# Altium PCB amplifier.PcbDoc
Units mil, origin at the board's own origin, x right, y up, seen from the top; angles counter-clockwise.
Board outline 473.22 x 1259.84 mil, 2 copper layers (Top Layer, Bottom Layer); 25 components, 19 nets, 69 pads, 12 vias.
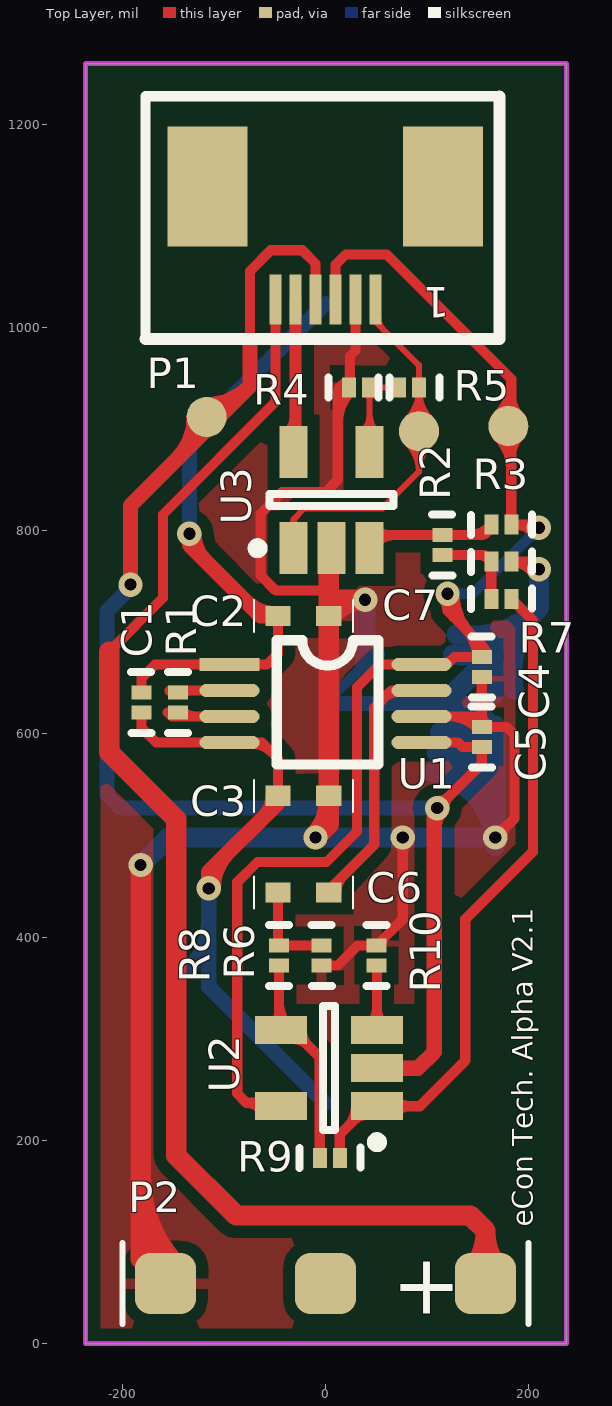
[diagram p0: Top Layer view]
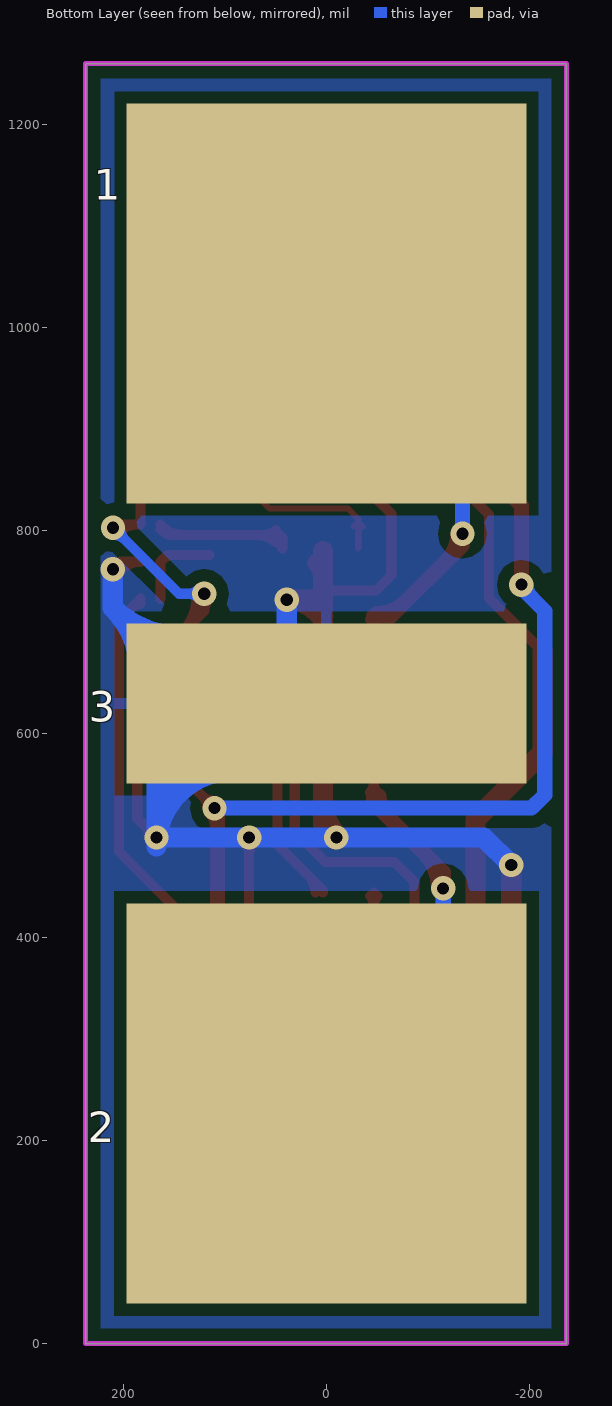
[diagram p1: Bottom Layer view, seen from below]

## Layer stack, top to bottom
Top Layer: signal copper 1.4
Dielectric: dielectric 12.6, FR-4, Dk 4.8
Bottom Layer: signal copper 1.4

## Board outline
-236.22,0 237,0 237,1259.84 -236.22,1259.84

## Design rules (kind name [scope] priority, off if disabled: settings)
AssemblyTestPointUsage [All] p1 off:
AssemblyTestpoint [All] p1 off: testpointundercomponent=TRUE minsize=40 maxsize=100 preferedsize=60 minholesize=0 maxholesize=40 preferedholesize=32 testpointgrid=1 usegrid=TRUE gridtolerance=0.01 allowsidetop=TRUE allowsidebottom=TRUE
Clearance Clearance_1 [InPolygon] p1: gap=12
Clearance [All] p2: gap=5
ComponentClearance [All] p1 off: gap=10 collisioncheckmode=3 verticalgap=10 showdistances=FALSE
DiffPairsRouting [All] p1 off: maxlimit=10 minlimit=10 mostfreqgap=10 maxuncoupledlength=500
FabricationTestPointUsage [All] p1 off: valid=0 allowmultiple=FALSE
FabricationTestpoint [All] p1 off: side=3 testpointundercomponent=TRUE minsize=40 maxsize=100 preferedsize=60 minholesize=0 maxholesize=40 preferedholesize=32 testpointgrid=1 allowsidetop=TRUE allowsidebottom=TRUE usegrid=TRUE gridtolerance=0.01
FanoutControl Fanout_BGA [IsBGA] p1 off: bgadir=Out bgaviamode=Centered fanoutstyle=Auto fanoutdirection=Alternating viagrid=1 // Fanout_BGA (Default Rule)
FanoutControl Fanout_LCC [IsLCC] p2 off: bgadir=Out bgaviamode=Centered fanoutstyle=Auto fanoutdirection=Alternating viagrid=1 // Fanout_LCC (Default Rule)
FanoutControl Fanout_SOIC [IsSOIC] p3 off: bgadir=Out bgaviamode=Centered fanoutstyle=Auto fanoutdirection=Alternating viagrid=1 // Fanout_SOIC (Default Rule)
FanoutControl Fanout_Small [(CompPinCount < 5)] p4 off: bgadir=Out bgaviamode=Centered fanoutstyle=Auto fanoutdirection=OutThenIn viagrid=1 // Fanout_Small (Default Rule)
FanoutControl Fanout_Default [All] p5 off: bgadir=Out bgaviamode=Centered fanoutstyle=Auto fanoutdirection=Alternating viagrid=1 // Fanout_Default (Default Rule)
Height [All] p1 off: minheight=0 maxheight=1000 prefheight=500
HoleSize [All] p1 off: absolutevalues=TRUE maxlimit=100 minlimit=1 maxpercent=80.000 minpercent=20.000
HoleToHoleClearance [All] p1 off: gap=10 allowstackedmicrovias=TRUE
LayerPairs [All] p1 off: enforce=TRUE
MinimumSolderMaskSliver [All] p1 off: minsoldermaskwidth=10
NetAntennae [All] p1 off: netantennaetolerance=0
PasteMaskExpansion [All] p1 off: expansion=0
PlaneClearance [All] p1 off: clearance=20
PlaneConnect [All] p1 off: planeconnectstyle=Relief reliefexpansion=20 reliefentries=4 reliefconductorwidth=10 reliefairgap=10
PolygonConnect PolygonConnect_1 [(InPadClass('All Pads'))] p1: connectstyle=Relief reliefconductorwidth=10 reliefentries=4 polygonreliefangle="90 Angle" airgapwidth=10
PolygonConnect [All] p2: connectstyle=Direct reliefconductorwidth=10 reliefentries=4 polygonreliefangle="90 Angle" airgapwidth=10
RoutingCorners [All] p1 off: cornerstyle=45-Degree minsetback=100 maxsetback=100
RoutingLayers [All] p1 off: top layer_v5=TRUE bottom layer_v5=TRUE
RoutingPriority [All] p1 off: routingpriority=0
RoutingTopology [All] p1 off: topology=Shortest
RoutingVias [All] p1: holewidth=12 width=24 viastyle="Through Hole" minholewidth=12 minwidth=24 maxholewidth=12 maxwidth=24
SilkToSilkClearance [All] p1 off: silktosilkclearance=10
SilkToSolderMaskClearance SilkscreenOverComponentPads [IsPad] p1 off: minsilkscreentomaskgap=10 clearancetoexposedcopper=TRUE
SolderMaskExpansion [All] p1 off: expansion=4
Width [All] p1: maxlimit=20 minlimit=6 preferedwidth=6
2 further rules are at their usual default settings.

## Components (designator, comment, footprint, x,y, rotation, side; value= is the part's Value field where it differs from the comment)
1 "Electrode" elec-diff 0,1023.62 r270 bottom locked
2 "Electrode" elec-diff 0,236.22 r270 bottom locked
3 "Electrode" elec-ref 0,629.92 r270 bottom locked
C1 "" 0201 -181.22,631 r90 top
C2 "" "0402 - MI" -46.78,716 r0 top
C3 "" "0402 - MI" 3.22,539 r180 top
C4 "Cap" 0201 153.78,666 r270 top
C5 "Cap" 0201 153.78,597 r270 top
C6 "" "0402 - MI" -46.78,443.84 r0 top
C7 "" 0201 173,769.5 r180 top
P1 "Header 6" "6P_0.5mm(FPC) - duplicate" 49.21,1027.56 r180 top locked
P2 "Header 3" BAT3 0,59.06 r0 top locked (schematic designator P3)
R1 "4.42k" 0201 -145.22,631 r270 top
R2 "10K" 0201 115,786 r90 top
R3 "10K" 0201 173,806 r180 top
R4 "10K" 0201 33.16,941 r180 top
R5 "10K" 0201 82.09,941 r180 top
R6 "2.7K" 0201 -3.78,381.84 r90 top
R7 "1K" 0201 173,733 r180 top
R8 "1K" 0201 -45.78,381.84 r270 top
R9 "10K" 0201 4.22,182.84 r0 top
R10 "2.7K" 0201 50.22,381.84 r270 top
U1 "AD8236" MSOP-8 0,629.92 r0 top locked
U2 "AD8603" SOT23-5AM 3.32,271 r180 top
U3 "AD8603" SOT23-5AM 6,830 r90 top locked

## Footprints (in the part's own frame and the unit in brackets; to place one, negate y for a bottom-side part, rotate by r counter-clockwise, add the part's x,y. Pads: shape width x height; smd on the part's side, far side on the other; paste and mask are expansions set on the pad)
"6P_0.5mm(FPC) - duplicate" [mm]
  rect 2x3 smd: 0(-1.69,-2.825) 7(4.2,-2.825)
  rect 0.3x1.25 smd mask+0.051: 1(0,0) 2(0.5,0) 3(1,0) 4(1.5,0) 5(2,0) 6(2.5,0)
  silkscreen extent -3.1,-5.08 5.75,0.99
0201 [mm]
  rect 0.35x0.5 smd: 1(-0.25,0) 2(0.25,0)
  silkscreen extent -0.76,-0.25 0.76,0.25
"0402 - MI" [mil]
  rect 25x20 smd: 1(0,0) 2(50,0)
  silkscreen extent -24,-16 74,16
BAT3 [mil]
  rrect50% 60x60 smd: 1(-157.48,0) 2(0,0) 3(157.48,0)
  silkscreen extent -200,-40 200,40
elec-diff [mm] "12*5mm"
  rect 10x10 smd: 1(0,0)
elec-ref [mm] "12*5mm"
  rect 4x10 smd: 1(0,0)
MSOP-8 [mm]
  rect 1.5x0.325 smd: 1(-2.4,0.975)
  oval 1.5x0.325 smd: 2(-2.4,0.325) 3(-2.4,-0.325) 4(-2.4,-0.975) 5(2.4,-0.975) 6(2.4,-0.325) 7(2.4,0.325) 8(2.4,0.975)
  silkscreen extent -1.22,-1.52 1.32,1.58
SOT23-5AM [mm] "SOT23, 5-Leads, Body 2.9x1.7mm, Pitch 0.95mm, Lead Span 2.8mm, IPC Low Density"
  rect 1.3x0.7 smd: 1(-1.2,0.95) 2(-1.2,0) 3(-1.2,-0.95) 4(1.2,-0.95) 5(1.2,0.95)
  silkscreen extent -1.33,-1.55 0.15,1.97, body extent -0.9,-1.55 0.9,1.55, height 1.45

## Part data
C1 C2 C3 C6 C7: library part Cap, "Capacitor"
C4 C5: "Capacitor"
P1: "Header, 6-Pin"
P2: "Header, 3-Pin"
R1 R2 R3 R4 R5 R6 R7 R8 R9 R10: library part Res2, "Resistor"
U1: library part INA128UA, "Precision, Low-Power Instrumentation Amplifiers"

## Free pads (board coordinates)
  round 39.37 smd: 0(92,898) 1(180,903) 2(-117,912)

## Via types
v1: diameter 24, hole 12, Top Layer to Bottom Layer, tented both sides, 9 vias
v2: diameter 24, hole 12, Top Layer to Bottom Layer, 3 vias

## Nets (pads, with @x,y where several pads share a name; then routed paths per layer and width w, separated by ;. In a path a pad name is that pad's centre, name@x,y a point inside that pad or via, vN(x,y) a via of type N, cw(c..) or ccw(c..) an arc to the next point about the centre after c; other vN are vias at no path point)
+3.3V: P1.5 U3.5 | length 180.6
  Top Layer w6: U3.5 U3.5@-29.53,879.12
  Top Layer w12: U3.5@-36.9,894.56 ccw(c-54.71,912.36) -29.53,912.36 ; U3.5@-29.53,879.12 P1.5 ; -29.53,903.31 ccw(c-17.14,903.31) U3.5@-25.9,894.56
+3.7V: P1.6 P2.3 | length 1400.6
  Top Layer w10: -213,681 -160,734 -160,816 -49.21,926.79 P1.6
  Top Layer w20: -213,681 -213,582.09 -146.91,516 -146.91,184.91 -88,126 142.48,126 157.48,111 P2.3 ; P2.3@143.34,73.2 ccw(c109.2,107.34) 157.48,107.34 ccw(c205.76,107.34) P2.3@171.62,73.2
+VS: C4.1 P1.3 pad.1 R3.1 U1.8 U2.5 | length 1659.7
  Top Layer w10: U2.5@-63.15,228.89 ccw(c-77.9,219.52) -77.9,237 ; U2.5 -47.33,237 -77.91,237 ; P1.3 9.84,1061.75 20.09,1072 60.09,1072 182.84,949.25 R3.1 205.09,806 210,801.09 v1(210,803) ; v1@115.14,733.05 cw(c103.19,721.1) 120.09,721.1 cw(c136.99,721.1) v1@125.04,733.05 ; v1@117.09,738 ccw(c150.89,738) 126.99,714.1 ; U1.8@117.62,669.7 ccw(c117.62,677.38) 123.05,671.95 ; v1(120.09,738) 120.09,721 153.78,687.32 C4.1 126.94,675.84 119.4,668.31 U1.8 53.31,668.31 31,646 31,504 1,474 -66.91,474 -86.91,454 -86.91,246 -77.91,237 ; v1@127.09,738 ccw(c185.04,738) 144.07,697.03 ; 137.4,703.69 cw(c109.55,675.84) C4.1@148.94,675.84 ; 154.47,686.62 cw(c143.69,675.84) C4.1@158.94,675.84 ; pad.1@169.62,892.62 cw(c137.68,860.68) 182.84,860.68 ; pad.1@169.62,913.38 ccw(c137.68,945.32) 182.84,945.32 ; 182.84,874.41 cw(c208.59,874.41) pad.1@190.38,892.62 ; 182.84,931.59 ccw(c208.59,931.59) pad.1@190.38,913.38 ; R3.1@185.86,806 cw(c185.86,778.86) v1@205.05,798.05
  Bottom Layer w10: v1(120.09,738) 145,738 205,798 213.09,798 210,801.09 v1(210,803) ; v1@125.04,733.05 cw(c136.99,721.1) 136.99,738 cw(c136.99,754.9) v1@125.04,742.95 ; v1@203,803 cw(c186.1,803) 198.05,791.05 cw(c210,779.1) v1@210,796
-VS: C5.2 P1.4 pad.2 U1.5 U2.2 | length 1634.6
  Top Layer w10: -74.41,985 -74.41,1055.5 -53.91,1076 -22.91,1076 -9.84,1062.94 P1.4 ; U1.5 130.56,591.54 135.09,587 C5.2@153.62,587 ; v1@107.09,524 153.78,570.68 C5.2 ; v1@110,534 ccw(c110,551.13) 122.11,539.02 ; v1@117,527 cw(c133.67,527) 121.88,538.79
  Top Layer w15: v2(-192,747) -192,824.91 -74.41,942.5 -74.41,985 ; -146.35,870.55 ccw(c-187.8,912) pad.2@-129.19,912 ; pad.2@-117,924.18 ccw(c-117,982.8) -75.55,941.35 ; U2.2 91.09,271 107.09,287 v1@107.09,524 ; U2.2@66.81,266.56 cw(c77.53,255.84) 77.53,271 cw(c77.53,286.16) U2.2@66.81,275.44 ; 107.09,509.12 cw(c127.88,509.12) v1@113.18,523.82
  Bottom Layer w15: -201.8,734.2 ccw(c-214.61,747) v2@-196.5,747 ; v2(-192,747) -192,744 -215,721 -215,540 -202,527 v1(110,527)
GND: 3.1 C2.2 C3.1 C4.2 C5.1 C7.1 P1.2 P2.1 R4.2 R6.1 R10.1 U1.6 U3.2 | length 4004.4
  Top Layer w10: R6.1 12.09,372 31.78,391.68 R10.1 76,417.46 v1(76,498) ; C2.2@-1.91,716 C2.2@3.22,710.87 ; 3.22,732 C2.2 3.22,741 -48.91,741 -63.91,756 -63.91,817 -42.91,838 0,838 12.09,850.09 12.09,929.78 R4.2 24.09,941.78 24.09,972 29.53,977.43 P1.2 ; U3.2@3.22,779.98 U3.2 ; 12.09,906.4 cw(c54.97,906.4) R4.2@24.65,936.71 ; 12.09,924.11 cw(c24.17,924.11) R4.2@23.43,936.16 ; 12.09,930.54 cw(c30.82,930.54) R4.2@17.58,943.78 ; 12.09,934.74 cw(c23.52,934.74) R4.2@22.82,946.14 ; 15.05,932.73 cw(c23.32,924.47) R4.2@23.32,936.16 ; R10.1@55.06,391.68 cw(c66.75,391.68) 58.49,399.95 ; v1@71.05,493.05 cw(c59.1,481.1) 76,481.1 cw(c92.9,481.1) v1@80.95,493.05 ; U1.6 143.5,617.13 C5.1 ; U1.6@121.44,617.13 cw(c121.44,577.45) C5.1@149.49,605.51 ; 145.51,615.11 cw(c137.25,606.84) C5.1@148.94,606.84 ; 145.58,617.13 cw(c145.58,601.6) C5.1@156.56,612.58 ; C4.2 C5.1 ; v1@167.09,504 173.09,504 186.09,517 186.09,599 178.25,606.84 C5.1 ; v1@167.09,505 ccw(c167.09,521.9) 179.04,509.95 ccw(c190.99,498) v1@174.09,498 ; v1@204.29,758.09 ccw(c182.84,743.64) C7.1 202.59,769.5 v1(210.09,762) ; 3.22,728.07 ccw(c15.29,728.07) 6.76,719.54 cw(c15.29,728.07) 3.22,728.07 ; 3.22,728.07 cw(c-8.85,728.07) -0.32,719.54 ccw(c-8.85,728.07) 3.22,728.07
  Top Layer w20: -182,118.25 ccw(c-98.28,118.25) P2.1 -182,83.57 v2(-182,471) ; -182,166.54 ccw(c-50,166.54) P2.1@-143.34,73.2 ; v1@-11.32,499.41 ccw(c-46.42,534.52) C3.1@3.22,534.52 ; v1(-9.91,498) 3.22,511.13 C3.1 C2.2@3.22,710.87 ; C2.2 U3.2@3.22,779.98 ; 3.22,732 v1(39,732) ccw(c39,689.39) C2.2@5.72,716 ; 3.22,755.11 cw(c21.83,755.11) U3.2@8.67,768.27
  Bottom Layer w10: 3.1@39,668.92 3.1 3.1@115.92,629.92
  Bottom Layer w15: 3.1 145.08,629.92 3.1@167.09,607.91
  Bottom Layer w20: v2(-182,471) -155,498 ; -105,498 -155,498 ; 3.1@39,668.92 v1(39,732) ; 3.1@39,701.72 ccw(c71.8,701.72) 3.1@48.61,678.53 ; 3.1@105.98,562.26 cw(c92.87,489.2) v1@167.09,489.2 ; 3.1@109.51,581.95 cw(c97.16,513.11) 167.09,513.11 ; 3.1@113.04,601.63 cw(c101.45,537.02) 167.09,537.02 ; 3.1@115.92,629.92 210.09,724.09 ; 3.1@116.57,621.32 cw(c105.74,560.92) 3.1@167.09,560.92 ; 3.1@125.81,678.05 ccw(c136.14,742.64) 3.1@182.39,696.39 ; 3.1@128.97,697.8 ccw(c143.78,790.41) 210.09,724.09 ; 3.1@165.92,639.39 cw(c229.27,651.94) 3.1@183.61,697.61 ; 3.1@167.09,607.91 v1(167.09,498) v1(76,498) v1(-9.91,498) -155,498 ; 3.1@185.54,643.28 cw(c273.48,660.7) 210.09,724.09 ; v1(210.09,762) 210.09,724.09
Net1_1: 1.1 C1.2 C2.1 U1.1 | length 685.3
  Top Layer w10: C1.2 -181.22,654.78 -167.69,668.31 U1.1 -57.6,668.31 -46.78,679.13 C2.1 ; C2.1@-50.32,712.46 cw(c-58.85,703.93) -46.78,703.93 cw(c-34.71,703.93) C2.1@-43.24,712.46
  Top Layer w15: v2(-134,797) -134,786.09 -63.91,716 C2.1 ; v2@-129.5,797 ccw(c-92.31,797) -118.61,770.7 ; -78.52,730.61 ccw(c-49.28,759.85) C2.1@-49.28,718.5
  Bottom Layer w15: v2(-134,797) -134,889.62 1.1
Net2_1: 2.1 C1.1 C3.2 U1.4 | length 727.6
  Top Layer w10: C1.1 -181.22,606.22 -166.54,591.54 U1.4 -62.54,591.54 -46.78,575.78 C3.2 ; U1.4@-71.36,590.14 cw(c-71.36,565.46) -53.91,582.91 ; C3.2@-50.32,542.54 ccw(c-58.85,551.07) -46.78,551.07 ccw(c-34.71,551.07) C3.2@-43.24,542.54
  Top Layer w15: v1(-115,448) -115,463.91 -46.78,532.13 C3.2 ; v1@-110.5,448 cw(c-61.24,448) -96.07,482.83 ; -60.18,518.73 ccw(c-80.45,539) C3.2@-51.78,539
  Bottom Layer w15: 2.1@-133.89,370.11 ccw(c-179.5,415.72) 2.1@-115,415.72 ; v1(-115,448) -115,351.22 2.1
NetC6_1: C6.1 R6.2 R8.1 | length 119.8
  Top Layer w10: C6.1@-50.32,440.31 cw(c-58.85,431.77) -46.78,431.77 cw(c-34.71,431.77) C6.1@-43.24,440.31 ; -46.78,398.66 ccw(c-38.8,398.66) R8.1@-44.44,393.02 ; C6.1 -46.78,392.68 R8.1 R6.2
NetC6_2: C6.2 U1.7 | length 287.9
  Top Layer w10: C6.2 3.22,446.22 48,491 48,625.91 64.81,642.72 U1.7 ; C6.2@10.72,443.84 cw(c34.57,443.84) 17.71,460.71 ; 57.8,635.7 cw(c71.36,622.14) U1.7@71.36,641.32
NetC7_2: C7.2 R2.1 R7.2 | length 100.9
  Top Layer w10: R2.1 156.5,776.16 C7.2 R7.2 ; 149.65,776.16 cw(c149.65,758.95) C7.2@161.82,771.12
NetR1_1: R1.1 U1.2 | length 70.1
  Top Layer w6: -155.22,640.84 R1.1@-153.35,642.72
  Top Layer w10: R1.1@-153.35,642.72 U1.2 ; R1.1@-140.93,639.51 cw(c-133.18,631.76) -133.18,642.72
NetR1_2: R1.2 U1.3 | length 76.8
  Top Layer w10: -155.22,621.16 -151.19,617.13 U1.3 ; R1.2@-140.93,622.49 ccw(c-127.97,635.45) -127.97,617.13
NetR2_2: R2.2 R3.2 U3.3 | length 213.2
  Top Layer w10: U3.3 43.4,793.4 45.84,795.84 R2.2 153,795.84 ; U3.3@49.61,788.36 cw(c67.68,770.29) 67.68,795.84 ; U3.3@49.61,800.77 ccw(c61.52,812.68) 61.52,795.84 ; 141.2,795.84 ccw(c141.2,825) R3.2@161.82,804.38 ; 154.89,797.73 cw(c163.16,789.47) R3.2@163.16,801.16 ; R3.2@161.28,803.26 cw(c153,804.17) 153,795.84 ; R3.2 153,795.84
NetR4_1: R4.1 R5.2 U3.4 | length 178.3
  Top Layer w6: U3.4@35.78,896.68 ccw(c17.38,915.08) 43.4,915.08 ccw(c69.43,915.08) U3.4@51.02,896.68 ; R4.1@40.25,935.3 cw(c32.64,927.69) 43.4,927.69 ; U3.4 43.4,940.6 R4.1 R5.2 ; 43.4,929.63 cw(c51.42,929.63) R4.1@45.75,935.3 ; R4.1@45.75,938.25 cw(c52.39,931.61) 52.39,941 cw(c52.39,950.39) R4.1@45.75,943.75 ; R5.2@69.5,938.25 ccw(c62.86,931.61) 62.86,941 ccw(c62.86,950.39) R5.2@69.5,943.75
NetR7_1: R7.1 R9.2 U2.1 | length 743.1
  Top Layer w6: U2.1@42,233.6 U2.1
  Top Layer w10: R9.2 14.06,205.66 U2.1@42,233.6 ; 21.46,213.06 ccw(c0.92,233.6) U2.1@29.97,233.6 ; U2.1@29.31,220.91 cw(c38.75,211.47) U2.1@38.75,224.82 ; U2.1 92.69,233.6 137.55,278.45 137.55,417.55 204.09,484.09 204.09,711.75 R7.1 ; U2.1@68.58,227.39 cw(c83.57,212.4) 83.57,233.6 cw(c83.57,254.79) U2.1@68.58,239.81 ; R7.1@182.84,728.16 cw(c182.84,716.47) 191.11,724.73
NetR8_2: R8.2 R9.1 U2.4 | length 279.1
  Top Layer w6: U2.4@-45.78,318 -45.78,310.25 U2.4
  Top Layer w10: U2.4@-50.14,314.61 ccw(c-60.66,325.13) -45.78,325.13 ; U2.4@-45.78,318 R8.2 ; -45.78,334.06 ccw(c-18.27,334.06) U2.4@-37.72,314.61 ; U2.4 -32.4,308.4 -5.62,281.62 R9.1 ; U2.4@-32.12,299.62 cw(c-32.12,279.11) -17.61,293.61 ; U2.4@-23.34,308.4 ccw(c-1.46,308.4) -16.93,292.93
NetR10_2: R10.2 U2.3 | length 97
  Top Layer w6: R10.2 R10.2@50.56,371.66
  Top Layer w10: U2.3@44.35,314.61 ccw(c29.36,329.6) 50.56,329.6 ccw(c71.75,329.6) U2.3@56.77,314.61 ; U2.3 R10.2@50.56,371.66
NTC3: P2.2
VOUT: P1.1 pad.0 R5.1 U3.1 | length 624.6
  Top Layer w6: U3.1@-35.97,804.33 ccw(c-39.32,811.5) -31.4,811.5 ; U3.1 -31.4,811.5 ; U3.1@-26.84,804.33 cw(c-23.49,811.5) -31.4,811.5 ; P1.1 49.21,1005.54 91.94,962.82 R5.1 91.94,857.94 ; P1.1@52.12,1008.84 ccw(c67.09,1008.84) 56.5,998.25 ; pad.0@80.22,886.19 cw(c52.04,857.94) 91.94,857.94 ; pad.0@80.2,909.8 ccw(c51.87,938.13) R5.1@91.94,938.13 ; pad.0@84.44,905.56 ccw(c66.36,923.64) 91.94,923.64 ; pad.0@84.45,890.44 cw(c66.46,872.4) 91.94,872.4 ; R5.1@89.19,935.3 cw(c82.55,928.66) 91.94,928.66 cw(c101.33,928.66) R5.1@94.69,935.3 ; R5.1@89.19,946.7 ccw(c82.55,953.34) 91.94,953.34 ccw(c101.33,953.34) R5.1@94.69,946.7 ; 91.94,872.29 cw(c117.37,872.29) pad.0@99.51,890.4 ; 91.94,923.95 ccw(c117.95,923.95) pad.0@99.56,905.56 ; R5.1@91.94,938.43 ccw(c132.43,938.43) pad.0@103.8,909.8 ; pad.0@103.72,886.12 ccw(c131.54,857.94) 91.94,857.94 ; -31.4,811.5 -20.91,822 56,822 91.94,857.94
pads on no net: P1.0 P1.7

## Polygon pours and split planes (outlines as drawn)
GND on Bottom Layer "Top Layer-No Net" (solid, remove dead copper, pour order 4): -222,1315 391,1315 391,1142 391,-55 -299,-55 -494,-55 -494,92 -494,1335 -449,1335
GND on Top Layer "Top Layer-No Net" (solid, remove dead copper, pour order 2): -353,1309 317,1309 317,1021 317,-27 -301,-27

## Keep-outs
Keep-Out Layer:
  lines w5: 236.22,0 -236.22,0 -236.22,1259.84 236.22,1259.84 ; 237,0 237,1259.84

## Silkscreen, mask and mechanical layers (free items; w line width, h text height)
Top Overlay:
  text "eCon Tech. Alpha V2.1" at 204,115 h20 r90

## Text inside footprints (layer, text, board x,y; h text height)
P1: Top Overlay "1" at 122.05,1039.84 h30 r180
P2: Top Overlay "+" at 65,29.06 h60